# Altium PCB PCB.PcbDoc
Units mm, origin at the board's own origin, x right, y up, seen from the top; angles counter-clockwise.
Board outline 152.4 x 101.6 mm, 2 copper layers (Top Layer, Bottom Layer); 47 components, 37 nets, 151 pads, 22 vias.
Unrouted connection lines stored in the file: 70.
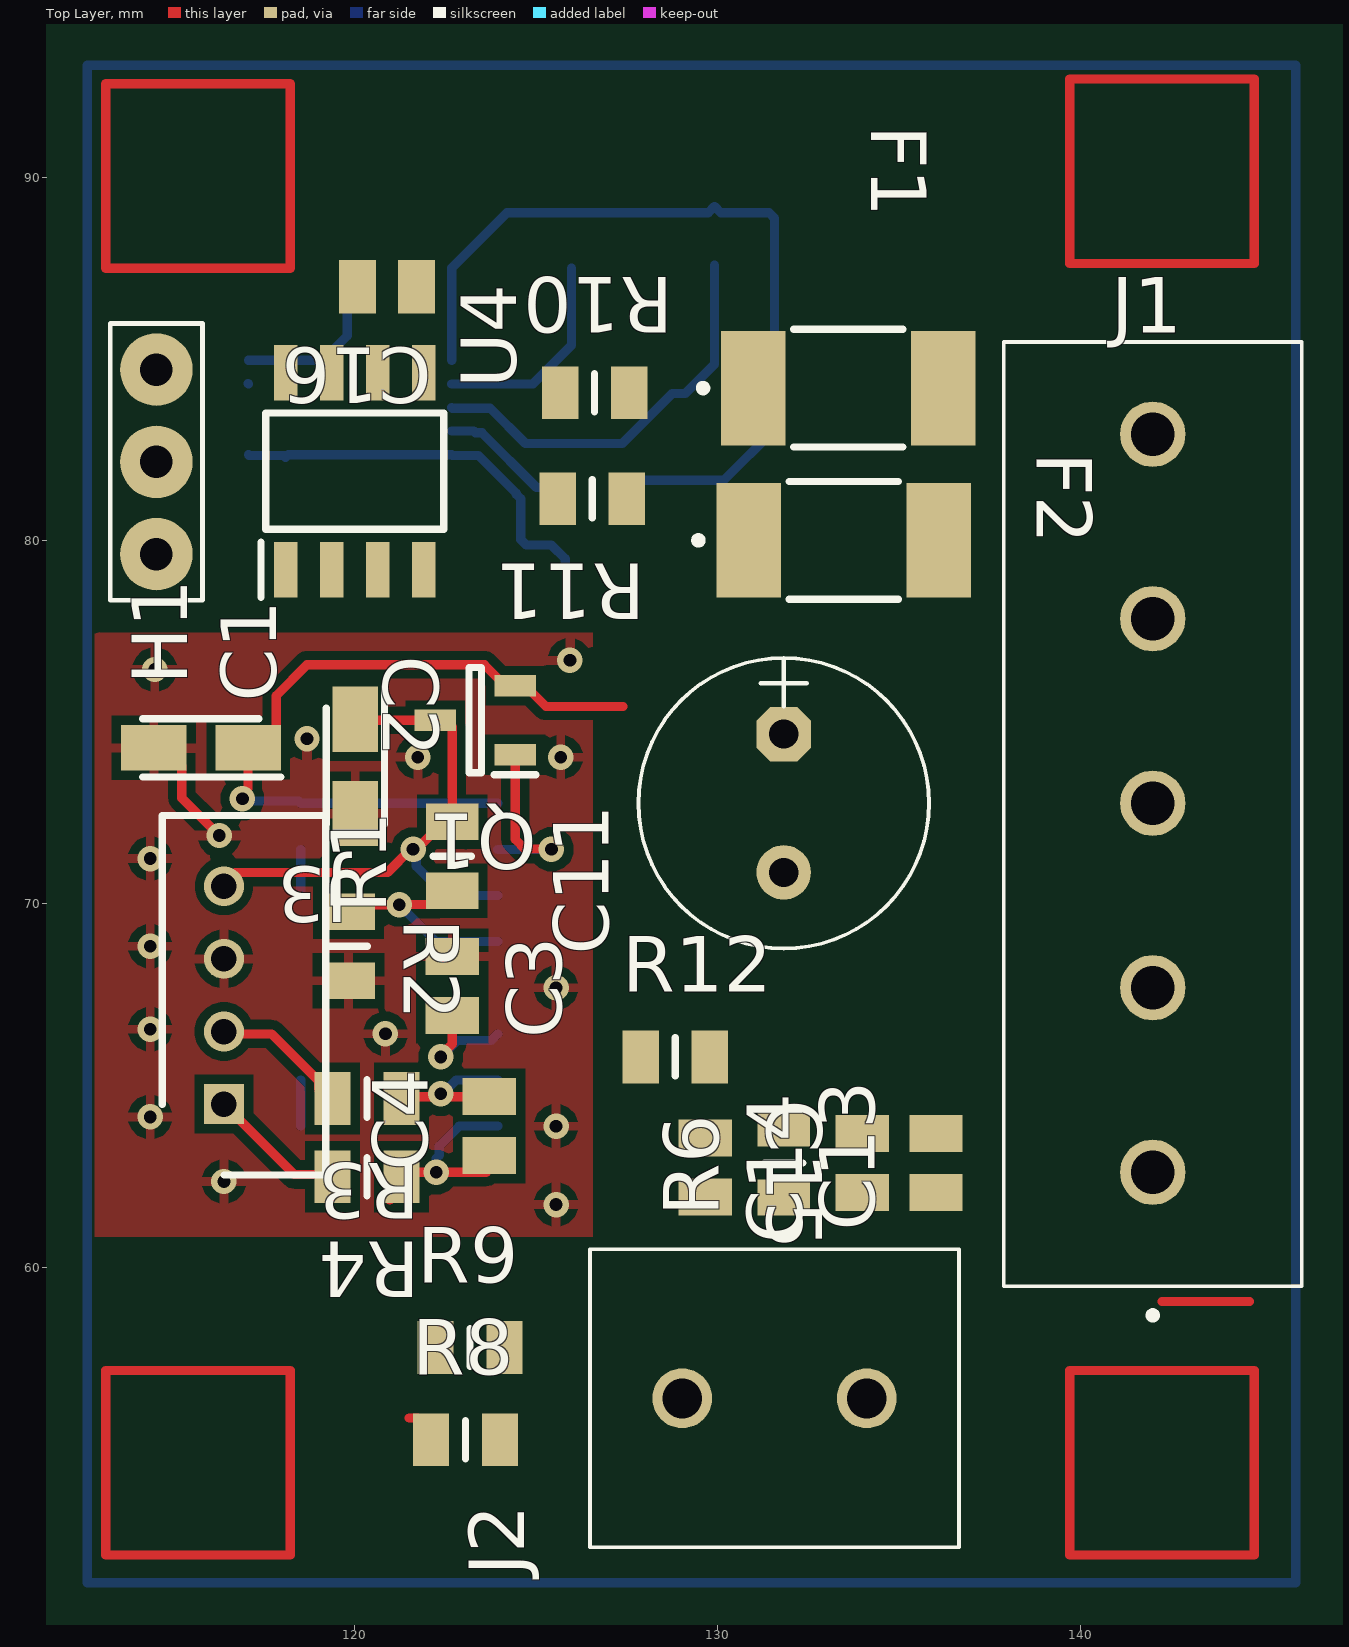
[diagram p0: Top Layer view]
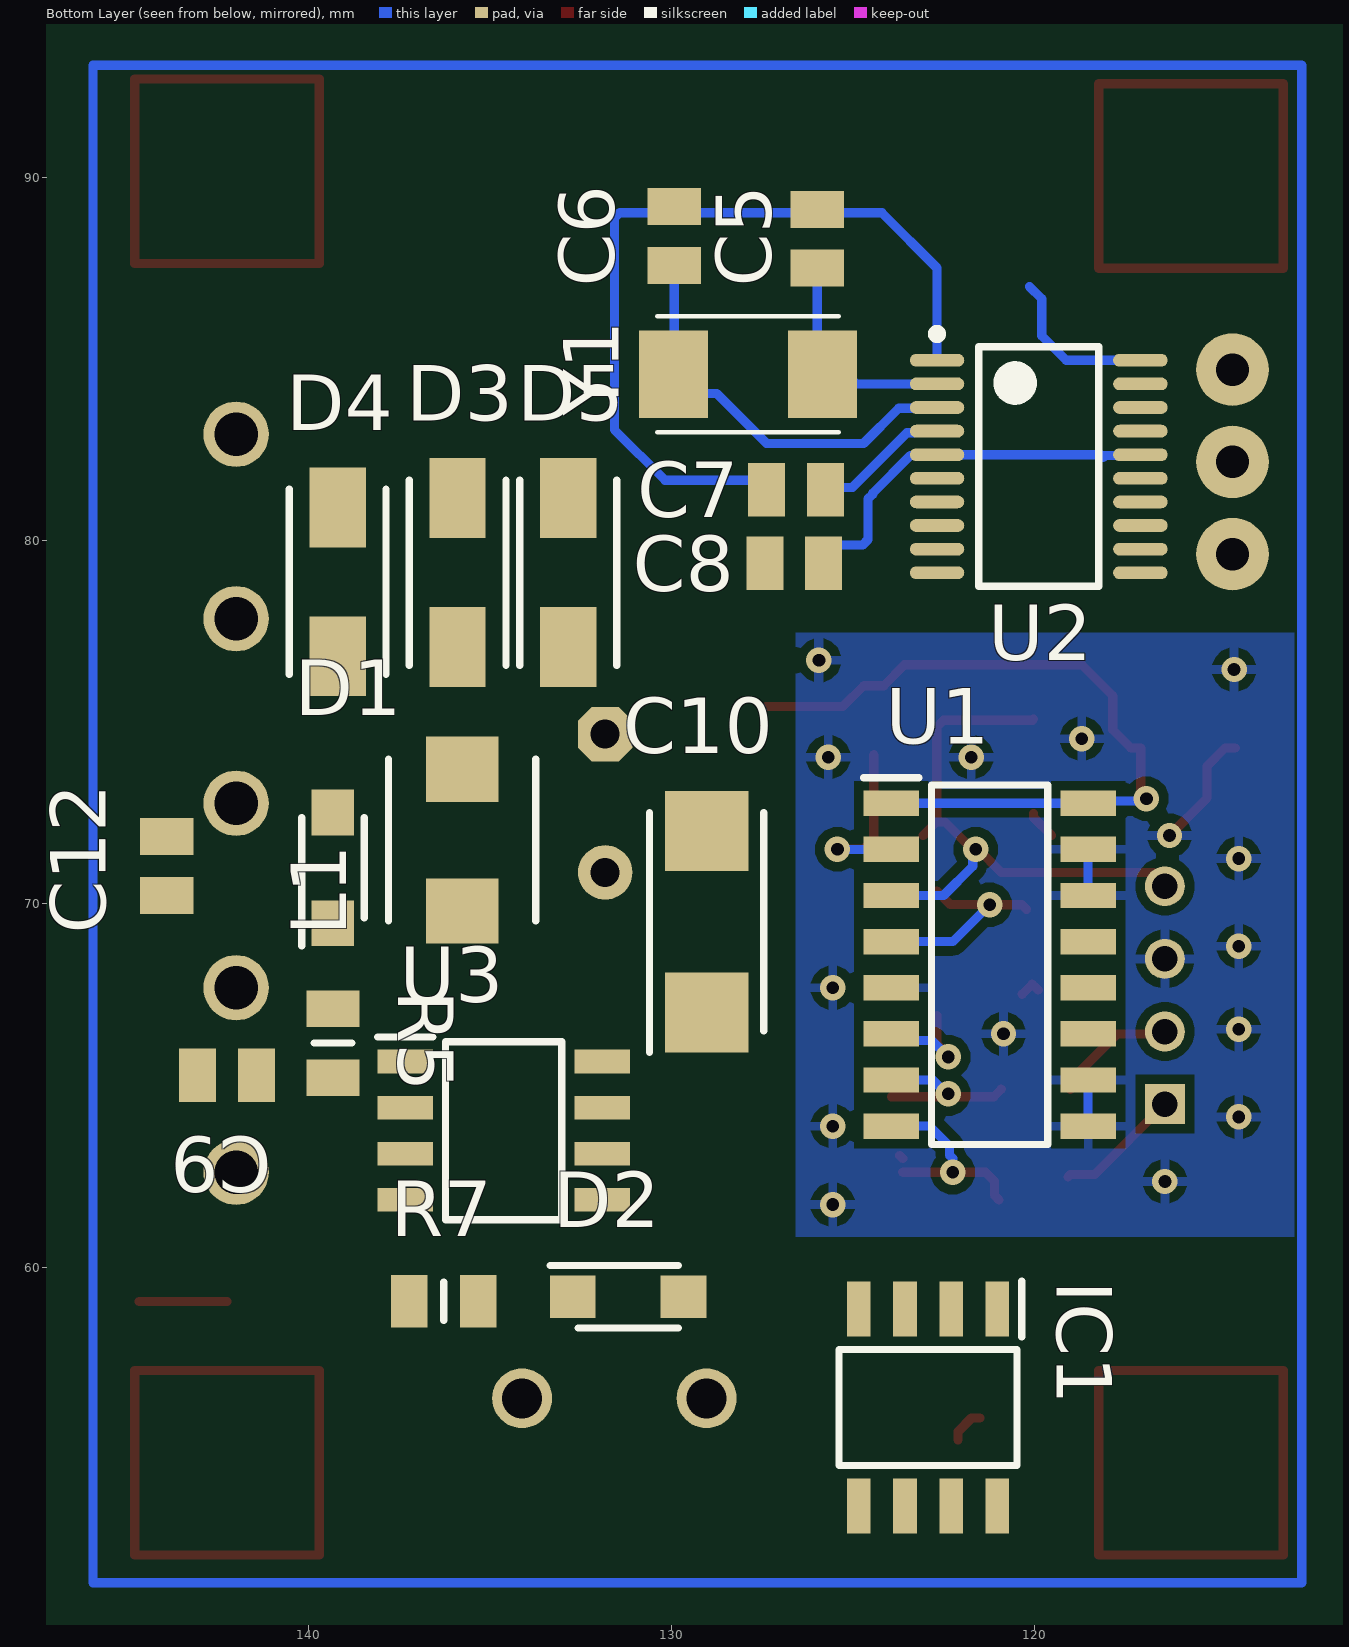
[diagram p1: Bottom Layer view, seen from below]

## Layer stack, top to bottom
Top Solder: solder mask 0.0102, Solder Resist, Dk 3.5
Top Layer: signal copper 0.0356
Dielectric 1: dielectric 0.32, FR-4, Dk 4.8
Bottom Layer: signal copper 0.0356
Bottom Solder: solder mask 0.0102, Solder Resist, Dk 3.5

## Board outline
25.4,25.4 177.8,25.4 177.8,127 25.4,127

## Design rules (kind name [scope] priority, off if disabled: settings)
Clearance [All] p1: gap=0.254 ignorepadtopadclearanceinfootprint=FALSE except(0: Arc-Hole Track-Hole SMDPad-Hole THPad-Hole Via-Hole Fill-Hole Poly-Hole Region-Hole Text-Hole)
PolygonConnect [All] p1: connectstyle=Relief reliefconductorwidth=0.254 reliefentries=4 polygonreliefangle="90 Angle" airgapwidth=0.254
RoutingVias [All] p1: holewidth=0.711 width=1.27 viastyle="Through Hole" minholewidth=0.711 minwidth=1.27 maxholewidth=0.711 maxwidth=1.27
SolderMaskExpansion [All] p1: expansion=0.102 istentingtop=FALSE
Width [All] p1: maxlimit=0.254 minlimit=0.254 preferedwidth=0.254
30 further rules are at their usual default settings.

## Classes and differential pairs
component class Supply: C9 C10 C11 C12 C13 C14 C15 D1 D2 IC1 J1 J2 L1 R5 R6 R7 R8 R9 R12 U3
component class MCU_RS485: C5 C6 C7 C8 C16 D3 D4 D5 F1 F2 H1 R10 R11 U2 U4 Y1
component class Signal: C1 C2 C3 C4 J3 Q1 R1 R2 R3 R4 U1

## Components (designator, comment, footprint, x,y, rotation, side; value= is the part's Value field where it differs from the comment)
C1 "10uF" CAPPM3216X180N 115.779,74.295 r180 top
C2 "10uF" CAPPM3216X180N 120.031,73.787 r270 top
C3 "100n" CAPC2012X94N 122.698,67.739 r90 top
C4 "100n" CAPC2012X94N 123.714,63.881 r90 top
C5 "22p" CAPC2012X94N 125.984,88.313 r90 bottom
C6 "22p" CAPC2012X94N 129.921,88.392 r90 bottom
C7 "100n" CAPC2012X94N 126.571,81.407 r180 bottom
C8 "100n" CAPC2012X94N 126.619,79.375 r180 bottom
C9 "100n" CAPC2012X94N 142.24,65.278 r0 bottom
C10 "470uF 6.3V Tant" CAPPM6032X280N 129.032,69.509 r90 bottom
C11 "470uF 35V" El-d8-h12-F3.81 131.826,72.771 r90 top
C12 "100nF" CAPC2012X94N 143.891,71.041 r90 bottom
C13 "8,2nF" CAPC2012X94N 136.017,62.865 r90 top
C14 "4,7nF" CAPC2012X94N 133.985,62.865 r90 top
C15 "100nF" CAPC2012X94N 129.667,62.738 r270 top
C16 "100n" CAPC2012X94N 120.904,86.995 r180 top
D1 "SS24FL" SODFL3617X108N 139.319,70.993 r90 bottom
D2 "SS24FL" SODFL3617X108N 131.191,59.182 r180 bottom
D3 "SMAJ6.5CA-E3_61" DIONM5127X229N 135.89,79.121 r90 bottom
D4 "SMAJ6.5CA-E3_61" DIONM5127X229N 139.192,78.867 r90 bottom
D5 "SMAJ6.5CA-E3_61" DIONM5127X229N 132.842,79.121 r90 bottom
F1 "1812L075PR" 1812L010DR 133.604,84.201 r0 top
F2 "1812L075PR" 1812L010DR 133.477,80.01 r0 top
H1 "SWD" J1x3 114.554,82.169 r270 top
IC1 "IRF7343PBF" SOIC127P600X175-8N 122.936,56.134 r270 bottom
J1 "282837-5" 2828375 141.986,62.611 r90 top
J2 "282837-2" 2828372 134.112,56.388 r180 top
J3 "B4B-PH-K-S_LF__SN_" SHDR4W50P0X200_1X4_990X450X600P 116.414,64.485 r270 top
L1 "IHLP1616BZERR22M01" INDPM4441X200N 135.763,71.755 r90 bottom
Q1 "S8550" SOT95P240X110-3N 123.333,75.057 r180 top
R1 "K" RESC2012X65N 122.698,71.308 r90 top
R2 "K" RESC2012X65N 119.843,68.834 r270 top
R3 "100" RESC2012X65N 120.351,64.643 r180 top
R4 "100" RESC2012X65N 120.351,62.484 r180 top
R5 "10.2K" RESC2012X65N 139.319,66.167 r270 bottom
R6 "13K" RESC2012X65N 131.826,62.865 r90 top
R7 "3,24K" RESC2012X65N 136.271,59.055 r180 bottom
R8 "100" RESC2012X65N 123.063,55.245 r0 top
R9 "10K" RESC2012X65N 123.19,57.785 r0 top
R10 "10" RESC2012X65N 126.619,84.074 r180 top
R11 "10" RESC2012X65N 126.553,81.153 r180 top
R12 "0" RESC2012X65N 128.839,65.786 r0 top
U1 "HX711" SOIC127P600X160-16N 121.24,68.326 r180 bottom
U2 "STM32F030F4P6" STM-TSSOP20_L 119.888,82.042 r180 bottom
U3 "TPS54331DR" SOIC127P600X175-8N 134.62,63.754 r180 bottom
U4 "SP3485CN-L" SOIC127P600X175-8N 120.015,81.915 r90 top
Y1 "8MHz" XTAL_ABM3-14.7456MHZ-D2Y-T 127.889,84.582 r180 bottom

## Footprints (in the part's own frame and the unit in brackets; to place one, negate y for a bottom-side part, rotate by r counter-clockwise, add the part's x,y. Pads: shape width x height; smd on the part's side, far side on the other; paste and mask are expansions set on the pad)
1812L010DR [mm]
  rect 1.78x3.15 smd: 1(-2.615,0) 2(2.615,0)
  silkscreen extent -4.1,-1.62 1.5,1.62, body extent -2.28,-1.63 2.28,1.63, height 0.75
2828372 [mm]
  round 1.65 hole 1.1: 1(0,0) 2(5.08,0)
  silkscreen extent -2.54,-4.1 7.62,4.1, body extent -2.51,-4.11 8.25,4.09, height 9.84
2828375 [mm]
  round 1.8 hole 1.2: 1(0,0) 2(5.08,0) 3(10.16,0) 4(15.24,0) 5(20.32,0)
  silkscreen extent -4.04,-4.1 22.86,4.1, body extent -3.08,-4.1 22.92,4.1, height 9.93
CAPC2012X94N [mm]
  rect 1.02x1.47 smd: 1(-0.81,0) 2(0.81,0)
  body extent -1,-0.63 1,0.63, height 0.94
CAPPM3216X180N [mm]
  rect 1.8x1.25 smd: 1(-1.3,0) 2(1.3,0)
  silkscreen extent -2.2,-0.8 1.6,0.8, body extent -1.7,-0.95 1.7,0.95, height 1.83
CAPPM6032X280N [mm]
  rect 2.2x2.3 smd: 1(-2.5,0) 2(2.5,0)
  silkscreen extent -3.6,-1.58 3,1.58, body extent -3,-1.58 3,1.58, height 2.8
DIONM5127X229N [mm]
  rect 2.2x1.55 smd: 1(-2.05,0) 2(2.05,0)
  silkscreen extent -2.55,-1.33 2.55,1.33, body extent -2.54,-1.34 2.55,1.33, height 2.17
El-d8-h12-F3.81 [mm]
  oct 1.5x1.5 hole 0.8 paste+0: 1(1.905,0)
  round 1.5 hole 0.8 paste+0: 2(-1.905,0)
  silkscreen extent -4,-4 4,4, body extent -4,-4 4.05,4.05, height 12.53
INDPM4441X200N [mm]
  rect 1.8x2 smd: 1(-1.95,0) 2(1.95,0)
  silkscreen extent -2.22,-2.03 2.22,2.03, body extent -2.22,-2.06 2.21,2.07, height 1.92
J1x3 [mm]
  round 2 hole 0.9 paste+0: 1(-2.54,0) 2(0,0) 3(2.54,0)
  silkscreen extent -3.81,-1.27 3.81,1.27, body extent -3.81,-1.27 3.81,1.27, height 10.1
RESC2012X65N [mm]
  rect 1x1.45 smd: 1(-0.95,0) 2(0.95,0)
  silkscreen extent 0,-0.52 0,0.53, body extent -1,-0.63 1,0.63, height 0.65
SHDR4W50P0X200_1X4_990X450X600P [mm]
  rect 1.1x1.1 hole 0.7: 1(0,0)
  round 1.1 hole 0.7: 2(-2,0) 3(-4,0) 4(-6,0)
  silkscreen extent -7.95,-1.7 1.95,2.8, body extent -7.95,-2.25 1.95,2.25, height 6
SODFL3617X108N [mm]
  rect 1.26x1.17 smd: 1(-1.525,0) 2(1.525,0)
  silkscreen extent -2.15,-0.86 1.38,0.86, body extent -1.8,-0.86 1.8,0.86, height 1.08
SOIC127P600X160-16N [mm]
  rect 1.525x0.7 smd: 1(-2.712,4.445) 2(-2.712,3.175) 3(-2.712,1.905) 4(-2.712,0.635) 5(-2.712,-0.635) 6(-2.712,-1.905) 7(-2.712,-3.175) 8(-2.712,-4.445) 9(2.712,-4.445) 10(2.712,-3.175) 11(2.712,-1.905) 12(2.712,-0.635) 13(2.712,0.635) 14(2.712,1.905) 15(2.712,3.175) 16(2.712,4.445)
  silkscreen extent -3.48,-4.95 1.6,5.15, body extent -3.06,-4.94 3.06,4.94, height 2.05
SOIC127P600X175-8N [mm]
  rect 1.525x0.65 smd: 1(-2.712,1.905) 2(-2.712,0.635) 3(-2.712,-0.635) 4(-2.712,-1.905) 5(2.712,-1.905) 6(2.712,-0.635) 7(2.712,0.635) 8(2.712,1.905)
  silkscreen extent -3.47,-2.45 1.6,2.58, body extent -3,-2.45 3,2.45, height 1.75
SOT95P240X110-3N [mm]
  rect 1.15x0.6 smd: 1(-1.1,0.95) 2(-1.1,-0.95) 3(1.1,0)
  silkscreen extent -1.68,-1.45 0.17,1.5, body extent -1.2,-1.45 1.2,1.45, height 1.1
STM-TSSOP20_L [mm]
  oval 1.5x0.35 smd paste+0: 1(-2.8,2.925) 2(-2.8,2.275) 3(-2.8,1.625) 4(-2.8,0.975) 5(-2.8,0.325) 6(-2.8,-0.325) 7(-2.8,-0.975) 8(-2.8,-1.625) 9(-2.8,-2.275) 10(-2.8,-2.925) 11(2.8,-2.925) 12(2.8,-2.275) 13(2.8,-1.625) 14(2.8,-0.975) 15(2.8,-0.325) 16(2.8,0.325) 17(2.8,0.975) 18(2.8,1.625) 19(2.8,2.275) 20(2.8,2.925)
  silkscreen extent -2.93,-3.3 1.65,3.77, body extent -2.25,-3.3 2.25,3.3, height 1.2
XTAL_ABM3-14.7456MHZ-D2Y-T [mm]
  rect 1.9x2.4 smd: 1(-2.05,0) 2(2.05,0)
  silkscreen extent -2.5,-1.6 2.5,1.6, body extent -2.5,-1.6 2.5,1.6, height 1.3

## Part data
C1 C2: library part 293D105X9016AW2E3, "Capacitor Polarised", Manufacturer_Name=Vishay, Datasheet Link=http://www.vishay.com/docs/40002/293d.pdf, Height=1.8mm, Manufacturer_Part_Number=293D105X9016AW2E3
C3 C4 C5 C6 C7 C8 C9 C12 C13 C14 C15 C16: library part 08055A471FAT4A, "Capacitor", Manufacturer_Name=AVX, Mouser Part Number=581-08055A471FAT4A, Arrow Part Number=08055A471FAT4A, Arrow Price/Stock=https://www.arrow.com/en/products/08055a471fat4a/avx, Datasheet Link=https://componentsearchengine.com/Datasheets/1/06031A100FAT2A.pdf, Height=0.94mm, Manufacturer_Part_Number=08055A471FAT4A, Mouser Price/Stock=https://www.mouser.com/Search/Refine.aspx?Keyword=581-08055A471FAT4A
C10: library part TAJC477K004RNJ, "Capacitor Polarised", Manufacturer_Name=AVX, Mouser Part Number=581-TAJC477K004RNJ, Arrow Part Number=TAJC477K004RNJ, Arrow Price/Stock=https://www.arrow.com/en/products/tajc477k004rnj/avx, Datasheet Link=http://datasheets.avx.com/TAJ.pdf, Height=2.8mm, Manufacturer_Part_Number=TAJC477K004RNJ, Mouser Price/Stock=https://www.mouser.com/Search/Refine.aspx?Keyword=581-TAJC477K004RNJ
C11: library part 100u-35V-105F, "35V-105F 0.5om 0.4A", Price=0.07
D1 D2: "Schottky Diode", Manufacturer_Name=onsemi, Mouser Part Number=512-SS24FL, Arrow Part Number=SS24FL, Arrow Price/Stock=https://www.arrow.com/en/products/ss24fl/on-semiconductor?region=europe, Datasheet Link=https://www.onsemi.com/pub/Collateral/SS26FL-D.PDF, Height=1.08mm, Manufacturer_Part_Number=SS24FL, Mouser Price/Stock=https://www.mouser.co.uk/ProductDetail/onsemi-Fairchild/SS24FL?qs=tqW9UTzndZyvT5hdH%252BfSxg%3D%3D
D3 D4 D5: "TVS Diode (Bi-directional)", Arrow Part Number=SMAJ6.5CA-E3/61, Manufacturer_Name=Vishay, Mouser Part Number=625-SMAJ6.5CA-E3, Arrow Price/Stock=https://www.arrow.com/en/products/smaj6.5ca-e361/vishay?region=nac, Datasheet Link=https://componentsearchengine.com/Datasheets/2/SMAJ6.5CA-E3_61.pdf, Height=2.29mm, Manufacturer_Part_Number=SMAJ6.5CA-E3/61, Mouser Price/Stock=https://www.mouser.co.uk/ProductDetail/Vishay-General-Semiconductor/SMAJ65CA-E3-61?qs=M2MvrwIlMUyD6pU3Wy9iEA%3D%3D
F1 F2: "Resettable Fuse", Manufacturer_Name=LITTELFUSE, Mouser Part Number=576-1812L075PR, Arrow Part Number=1812L075PR, Arrow Price/Stock=https://www.arrow.com/en/products/1812l075pr/littelfuse?region=nac, Datasheet Link=http://www.littelfuse.com/~/media/electronics/datasheets/resettable_ptcs/littelfuse_ptc_1812l_datasheet.pdf.pdf, Height=1.25mm, Manufacturer_Part_Number=1812L075PR, Mouser Price/Stock=https://www.mouser.co.uk/ProductDetail/Littelfuse/1812L075PR?qs=PWhpLWeW8weuCGexZfyXng%3D%3D
H1: library part H-1x3, Price=0.03
IC1: "Integrated Circuit", Manufacturer_Name=Infineon, Mouser Part Number=942-IRF7343PBF, Arrow Part Number=IRF7343PBF, Arrow Price/Stock=https://www.arrow.com/en/products/irf7343pbf/infineon-technologies-ag, Datasheet Link=https://www.infineon.com/dgdl/irf7343pbf.pdf?fileId=5546d462533600a4015355f68c1a1b73, Height=1.75mm, Manufacturer_Part_Number=IRF7343PBF, Mouser Price/Stock=https://www.mouser.co.uk/ProductDetail/Infineon-IR/IRF7343PBF?qs=oV44URRYgr3BtQItr9FXKw%3D%3D
J1: "Connector", Manufacturer_Name="TE Connectivity", Mouser Part Number=571-2828375, Arrow Part Number=282837-5, Arrow Price/Stock=https://www.arrow.com/en/products/282837-5/te-connectivity?region=nac, Datasheet Link=https://www.te.com/commerce/DocumentDelivery/DDEController?Action=srchrtrv&DocNm=282837&DocType=Customer+Drawing&DocLang=English, Height=10.3mm, Manufacturer_Part_Number=282837-5, Mouser Price/Stock=https://www.mouser.co.uk/ProductDetail/TE-Connectivity/282837-5?qs=A%252Bip%252BNCYi6MoalTIA9eyLA%3D%3D
J2: "Connector", Manufacturer_Name="TE Connectivity", Mouser Part Number=571-2828372, Arrow Part Number=282837-2, Arrow Price/Stock=https://www.arrow.com/en/products/282837-2/te-connectivity?region=europe, Datasheet Link=https://www.te.com/commerce/DocumentDelivery/DDEController?Action=srchrtrv&DocNm=282837&DocType=Customer+Drawing&DocLang=English&DocFormat=pdf&PartCntxt=282837-2, Height=10.3mm, Manufacturer_Part_Number=282837-2, Mouser Price/Stock=https://www.mouser.co.uk/ProductDetail/TE-Connectivity/282837-2?qs=A%252Bip%252BNCYi6O2H0NGWOeAxg%3D%3D
J3: "Connector", Arrow Part Number=B4B-PH-K-S(LF)(SN), Manufacturer_Name="JST (JAPAN SOLDERLESS TERMINALS)", Arrow Price/Stock=https://www.arrow.com/en/products/b4b-ph-k-s-lf-sn/jst-manufacturing?region=europe, Datasheet Link=https://datasheet.lcsc.com/szlcsc/JST-Sales-America-B4B-PH-K-S-LF-SN_C131334.pdf, Height=6mm, Manufacturer_Part_Number=B4B-PH-K-S(LF)(SN)
L1: "Inductor", Manufacturer_Name=Vishay, Mouser Part Number=70-IHLP1616BZERR22M0, Arrow Part Number=IHLP1616BZERR22M01, Arrow Price/Stock=https://www.arrow.com/en/products/ihlp1616bzerr22m01/vishay, Datasheet Link=https://datasheet.datasheetarchive.com/originals/distributors/Datasheets-DGA11/2193884.pdf, Height=2mm, Manufacturer_Part_Number=IHLP1616BZERR22M01, Mouser Price/Stock=https://www.mouser.co.uk/ProductDetail/Vishay-Dale/IHLP1616BZERR22M01?qs=UUKq9QDXQ0nvzHiHJuJb2g%3D%3D
Q1: "Transistor BJT PNP", Manufacturer_Name=Galaxy, Datasheet Link=https://datasheet.datasheetarchive.com/originals/distributors/Datasheets-3/DSA-49109.pdf, Height=1.1mm, Manufacturer_Part_Number=S8550
R1 R2 R3 R4 R5 R6 R7 R8 R9 R10 R11 R12: library part CPF0805B102KE1, "Resistor", Manufacturer_Name="TE Connectivity", Mouser Part Number=279-CPF0805B102KE1, Datasheet Link=http://docs-europe.electrocomponents.com/webdocs/13d1/0900766b813d116f.pdf, Height=0.65mm, Manufacturer_Part_Number=CPF0805B102KE1, Mouser Price/Stock=https://www.mouser.com/Search/Refine.aspx?Keyword=279-CPF0805B102KE1
U1: "Integrated Circuit", Manufacturer_Name=AVIA, Datasheet Link=https://cdn.sparkfun.com/datasheets/Sensors/ForceFlex/hx711_english.pdf, Height=1.6mm, Manufacturer_Part_Number=HX711
U2: "ARM Cortex-M0 32-bit MCU, 16 KB Flash, 4 KB Internal RAM, 15 I/Os, 20-pin TSSOP, -40 to 85 degC, Tube", I/Os (High Current)=15, Operating Frequency(F) (Processor speed) (MHz)=48, Supplier Part Number 1=497-14044-5-ND, Supply Voltage(Vcc) min (V)=2.4, ComponentLink1Description="Manufacturer URL", ComponentLink1URL=http://www.st.com/web/en/home.html, ComponentLink2Description=Datasheet, ComponentLink2URL=http://www.st.com/st-web-ui/static/active/en/resource/technical/document/datasheet/DM00088500.pdf, ComponentLink3Description="Package Specification", ComponentLink3URL=http://www.st.com/st-web-ui/static/active/en/resource/technical/document/datasheet/DM00065136.pdf, Core="ARM Cortex-M0", DatasheetVersion="Rev. 1", FLASH Size (Prog) (kB)=16, Internal RAM Size (kB)=4, Mounting Technology="Surface Mount", PackageDescription="20-Pin Thin Shrink Small Outline Package, 6.5 x 4.4 mm Body, 0.65 mm Pitch", PackageReference=TSSOP20, PackageVersion="Rev. 1, 11/2012", Packing=Tube, PartNumber=STM32F030F4P6, Supplier 1=Digi-Key, Supplier 2=Newark, Supplier 3=Mouser, Supplier Part Number 2=06X3648, Supplier Part Number 3=511-STM32F030F4P6
U3: library part TPS54331D, "Integrated Circuit", Manufacturer_Name="Texas Instruments", Mouser Part Number=595-TPS54331D, Arrow Part Number=TPS54331D, Arrow Price/Stock=https://www.arrow.com/en/products/tps54331d/texas-instruments?region=nac, Datasheet Link=http://www.ti.com/lit/gpn/tps54331, Height=1.75mm, Manufacturer_Part_Number=TPS54331D, Mouser Price/Stock=https://www.mouser.co.uk/ProductDetail/Texas-Instruments/TPS54331D?qs=QyYHynRG50pEbpiybdzwkw%3D%3D
U4: "Integrated Circuit", Manufacturer_Name=EXAR, Mouser Part Number=701-SP3485CN-L, Arrow Part Number=SP3485CN-L, Arrow Price/Stock=https://www.arrow.com/en/products/sp3485cn-l/exar, Datasheet Link=https://datasheet.datasheetarchive.com/originals/distributors/Datasheets-DGA14/1190127.pdf, Height=1.75mm, Manufacturer_Part_Number=SP3485CN-L, Mouser Price/Stock=https://www.mouser.com/Search/Refine.aspx?Keyword=701-SP3485CN-L
Y1: library part ABM3-14.7456MHZ-D2Y-T, "Ceramic SMD Crystal", Package="SMD-2 Abracon", Availability="In Stock", Check_prices=https://www.snapeda.com/parts/ABM3-14.7456MHZ-D2Y-T/Abracon+LLC/view-part/?ref=eda, MF=Abracon, MP=ABM3-14.7456MHZ-D2Y-T, Price=None, Purchase-URL=https://pricing.snapeda.com/search/part/ABM3-14.7456MHZ-D2Y-T/?ref=eda, SnapEDA_Link=https://www.snapeda.com/parts/ABM3-14.7456MHZ-D2Y-T/Abracon+LLC/view-part/?ref=snap

## Via types
v1: diameter 0.7, hole 0.35, Top Layer to Bottom Layer, 22 vias

## Nets (pads, with @x,y where several pads share a name; then routed paths per layer and width w, separated by ;. In a path a pad name is that pad's centre, name@x,y a point inside that pad or via, vN(x,y) a via of type N, cw(c..) or ccw(c..) an arc to the next point about the centre after c; other vN are vias at no path point)
AGND: C1.2 C2.2 C3.2 J3.3 R2.2 R12.1 U1.5 U1.9 U1.10 U1.14 U1.15 | length 7.3
  Top Layer w0.254: C1.2 114.754,74.295 115.252,73.797 115.252,72.917 v1(116.287,71.882) ; C2.2@119.533,71.882 120.031,72.38 C2.2 ; R2.2@119.904,67.63 R2.2@120.001,67.726 ; R2.2@120.064,67.79 R2.2@120.342,67.511
  Bottom Layer w0.254: v1(116.287,71.882) v1@116.408,71.882 ; U1.9 U1.10 ; U1.14 U1.15
  other v1: 125.558,61.722 116.414,62.357 125.558,63.881 114.382,64.135 120.859,66.421 114.382,66.548 125.558,67.691 114.382,68.834 114.382,71.247 121.748,74.041 125.685,74.041 118.7,74.549 114.509,76.454 125.939,76.708
GND: C5.2 C6.2 C7.1 C8.1 C10.2 C11.2 C12.2 C13.2 C14.2 C15.2 C16.1 D1.2 D4.1 D5.1 H1.3 IC1.1 IC1.3 J1.2 R7.2 R9.2 R12.2 U2.1 U2.15 U4.5 | length 23
  Bottom Layer w0.254: U2.1 122.688,87.509 124.206,89.027 129.746,89.027 C6.2 130.096,89.027 131.423,89.027 131.572,88.878 131.572,83.058 130.175,81.661 127.635,81.661 C7.1
NetC1_1: C1.1 C8.2 C10.1 C16.2 L1.2 Q1.2 R5.1 U1.1 U1.16 U2.5 U2.16 U4.8 | length 31.6
  Top Layer w0.254: v1(116.922,72.898) 116.922,73.019 117.079,73.176 C1.1 117.354,74.295 117.852,74.793 117.852,75.733 118.7,76.581 123.584,76.581 124.158,76.007 Q1.2 124.708,76.007 125.277,75.438 127.397,75.438
  Bottom Layer w0.254: v1(116.922,72.898) 116.985,72.834 118.464,72.834 U1.16 U1.1 ; U2.16 117.106,82.349 118.057,82.349 118.11,82.296 118.181,82.367 U2.5 122.706,82.349 123.418,82.349 124.46,81.306 124.46,81.28 124.587,81.153 124.587,80.032 124.736,79.883 125.426,79.883 125.809,79.5 C8.2
NetC2_1: C2.1 J3.4 Q1.3 R1.2 U1.3 | length 16.2
  Top Layer w0.254: J3.4@116.16,70.516 116.382,70.516 116.732,70.866 120.916,70.866 121.551,71.501 v1(121.621,71.501) 121.716,71.501 122.473,72.258 R1.2 ; C2.1 120.061,75.057 Q1.3 122.508,75.057 122.698,74.867 R1.2 ; R1.2@123.071,71.885 R1.2
  Bottom Layer w0.254: v1(121.621,71.501) 121.706,71.416 121.706,71.035 122.51,70.231 U1.3
NetC3_1: C3.1 U1.6 | length 3.1
  Top Layer w0.254: v1(122.383,65.786) 122.383,65.826 122.698,66.141 C3.1
  Bottom Layer w0.254: v1(122.383,65.786) 122.838,66.241 123.772,66.241 U1.6
NetC4_1: C4.1 R4.1 U1.8 | length 5.5
  Top Layer w0.254: R4.1@120.981,61.849 121.108,61.976 121.108,62.365 121.354,62.611 C4.1@123.635,62.611 ; C4.1@123.635,62.992 C4.1
  Bottom Layer w0.254: 122.256,62.992 122.341,63.077 122.341,63.331 122.891,63.881 U1.8
  other v1: 122.256,62.611
NetC4_2: C4.2 R3.1 U1.7 | length 4.8
  Top Layer w0.254: R3.1@120.92,64.897 121.126,64.691 C4.2 C4.2@123.939,64.691
  Bottom Layer w0.254: v1(122.383,64.77) 122.427,64.77 122.808,65.151 U1.7
NetC5_1: C5.1 U2.2 Y1.2 | length 5.9
  Bottom Layer w0.254: U2.2 124.921,84.317 125.44,84.836 125.984,85.38 C5.1
NetC6_1: C6.1 U2.3 Y1.1 | length 11.3
  Bottom Layer w0.254: U2.3 122.706,83.649 123.742,83.649 124.714,82.677 127.381,82.677 128.467,83.763 128.757,84.053 129.116,84.053 129.921,84.858 C6.1
NetC7_2: C7.2 U2.4 | length 3.7
  Bottom Layer w0.254: U2.4 123.289,83.017 123.337,82.969 123.516,82.969 125.019,81.466 125.702,81.466 C7.2
NetC9_1: C9.1 D1.1 L1.1 U3.7 U3.8
NetC9_2: C9.2 U3.1
NetC11_1: C11.1 C12.1 D2.1 J1.1 J2.1 U3.2
NetC13_1: C13.1 U3.4
NetC14_1: C14.1 R6.1 U3.6
NetC15_1: C15.1 R6.2
NetD2_2: D2.2 IC1.5 IC1.6 IC1.7 IC1.8 J2.2 | length 2.4
  Top Layer w0.254: 142.24,59.055 144.653,59.055
NetD3_1: D3.1 D5.2 F2.1 R11.1
NetD3_2: D3.2 D4.2 F1.1 R10.1
NetF1_2: F1.2 J1.5
NetF2_2: F2.2 J1.3
NetH1_1: H1.1 U2.19 | length 0
  Bottom Layer w0.254: U2.19@117.077,84.328 U2.19
NetH1_2: H1.2 U2.20 | length 4.5
  Bottom Layer w0.254: U2.20 119.13,84.967 119.808,85.645 119.808,86.661 120.142,86.995
NetIC1_2: IC1.2 IC1.4 R8.2 R9.1
NetJ3_1: J3.1 R4.2 | length 3.5
  Top Layer w0.254: J3.1 118.349,62.55 119.015,62.55 R4.2@119.081,62.484
NetJ3_2: J3.2 R3.2 | length 3.4
  Top Layer w0.254: J3.2 116.478,66.421 117.721,66.421 119.02,65.122 R3.2@119.02,64.897
NetQ1_1: Q1.1 U1.2 | length 4.9
  Top Layer w0.254: Q1.1 124.433,71.777 124.7,71.51 125.422,71.51 v1(125.431,71.501)
  Bottom Layer w0.254: U1.2 v1(125.431,71.501)
NetR1_1: R1.1 R2.1 U1.4 | length 5.8
  Top Layer w0.254: R2.1@120.224,69.85 120.351,69.977 v1(121.24,69.977) 121.248,69.985 122.325,69.985 R1.1
  Bottom Layer w0.254: v1(121.24,69.977) 122.256,68.961 U1.4
NetR5_2: R5.2 R7.1 U3.5
NetR8_1: R8.1 U2.14 | length 1
  Top Layer w0.254: 121.515,55.843 121.74,55.843 122.113,55.47 R8.1
NetR10_2: R10.2 U4.7
NetR11_2: R11.2 U4.6
NetU1_11: U1.11 U2.18
NetU1_12: U1.12 U2.17
NetU2_7: U2.7 U4.2 U4.3
NetU2_8: U2.8 U4.1
NetU2_9: U2.9 U4.4
pads on no net: J1.4 U1.13 U2.6 U2.10 U2.11 U2.12 U2.13 U3.3
copper on no net: | length 231.4
  Top Layer w0.254: 113.157,52.07 118.237,52.07 118.237,57.15 113.157,57.15 113.157,52.07 ; 113.157,87.503 118.237,87.503 118.237,92.583 113.157,92.583 113.157,87.503 ; 139.7,52.07 144.78,52.07 144.78,57.15 139.7,57.15 139.7,52.07 ; 139.7,87.63 144.78,87.63 144.78,92.71 139.7,92.71 139.7,87.63
  Bottom Layer w0.254: 112.649,51.308 145.923,51.308 145.923,93.091 112.649,93.091 112.649,51.308

## Polygon pours and split planes (outlines as drawn)
AGND on Bottom Layer "AGND_L02_P001" (solid, pour order 1): 112.858,77.47 126.574,77.47 126.574,60.833 112.858,60.833
AGND on Top Layer "AGND_L01_P000" (solid, pour order 0): 112.858,77.597 112.985,77.47 126.574,77.47 126.574,60.833 112.858,60.833

## Other copper
Multi-Layer:
  region: 109.996,76.606 109.996,76.676 110.032,76.676 110.032,76.57 109.996,76.57